# Altium PCB ShiftRegPCB.PcbDoc
Units mil, origin at the board's own origin, x right, y up, seen from the top; angles counter-clockwise.
Board outline 3917.32 x 2185.04 mil, 2 copper layers (Top Layer, Bottom Layer); 24 components, 18 nets, 81 pads, 0 vias.
Unrouted connection lines stored in the file: 3.
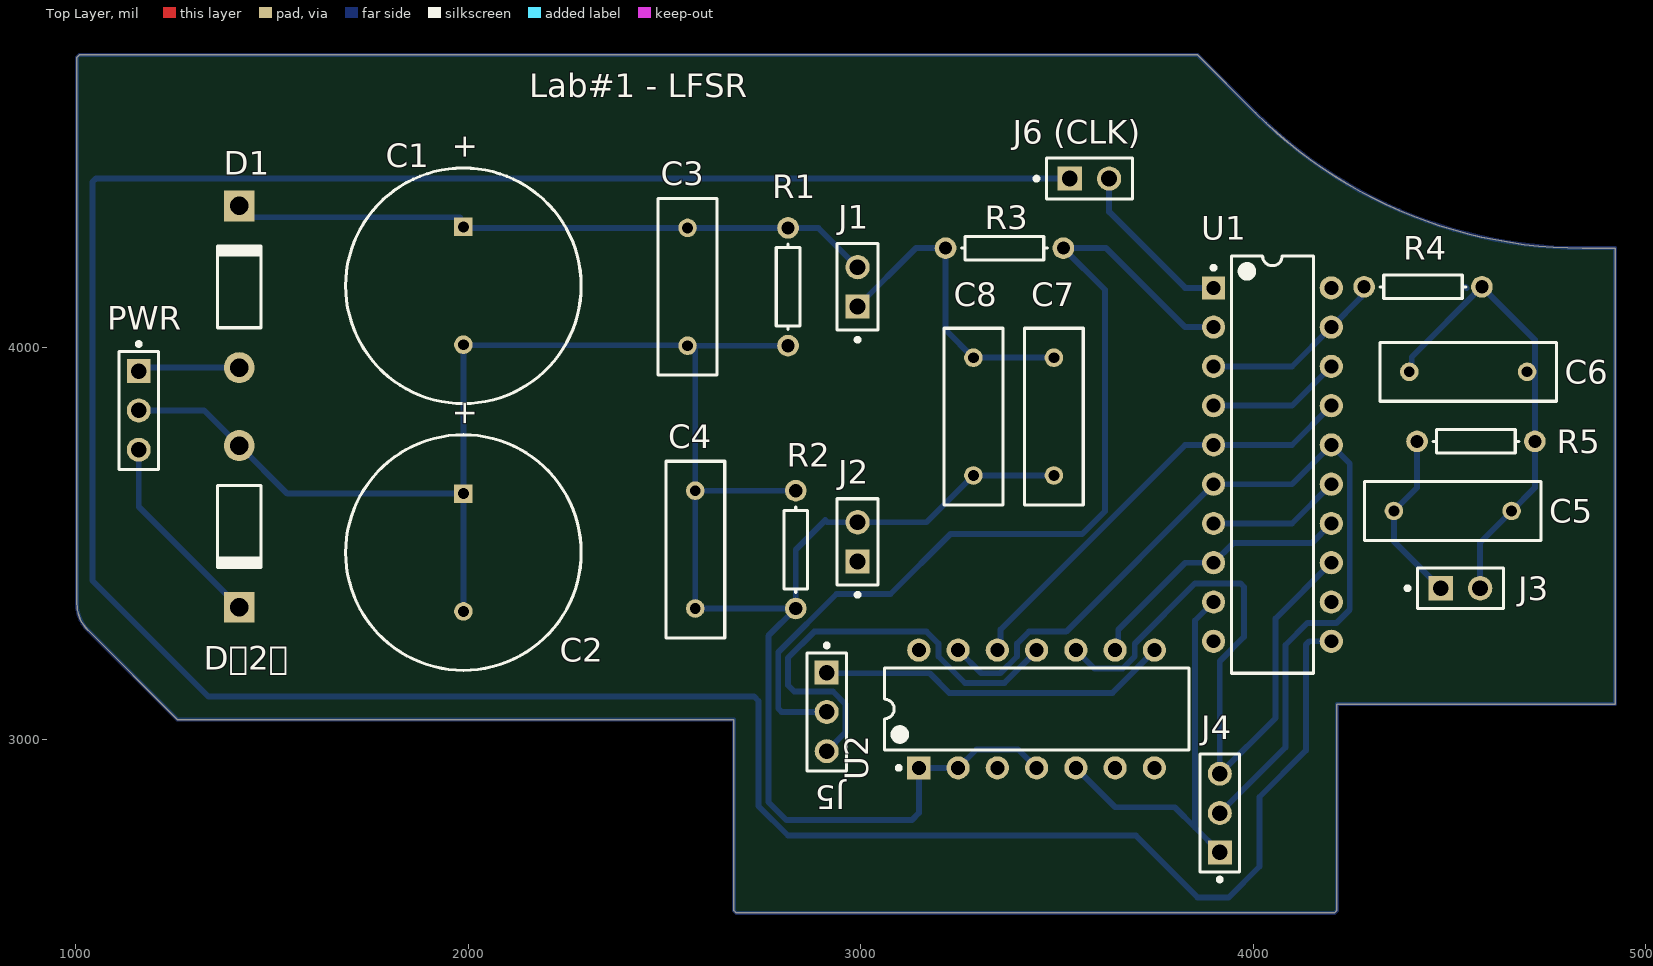
[diagram p0: Top Layer view]
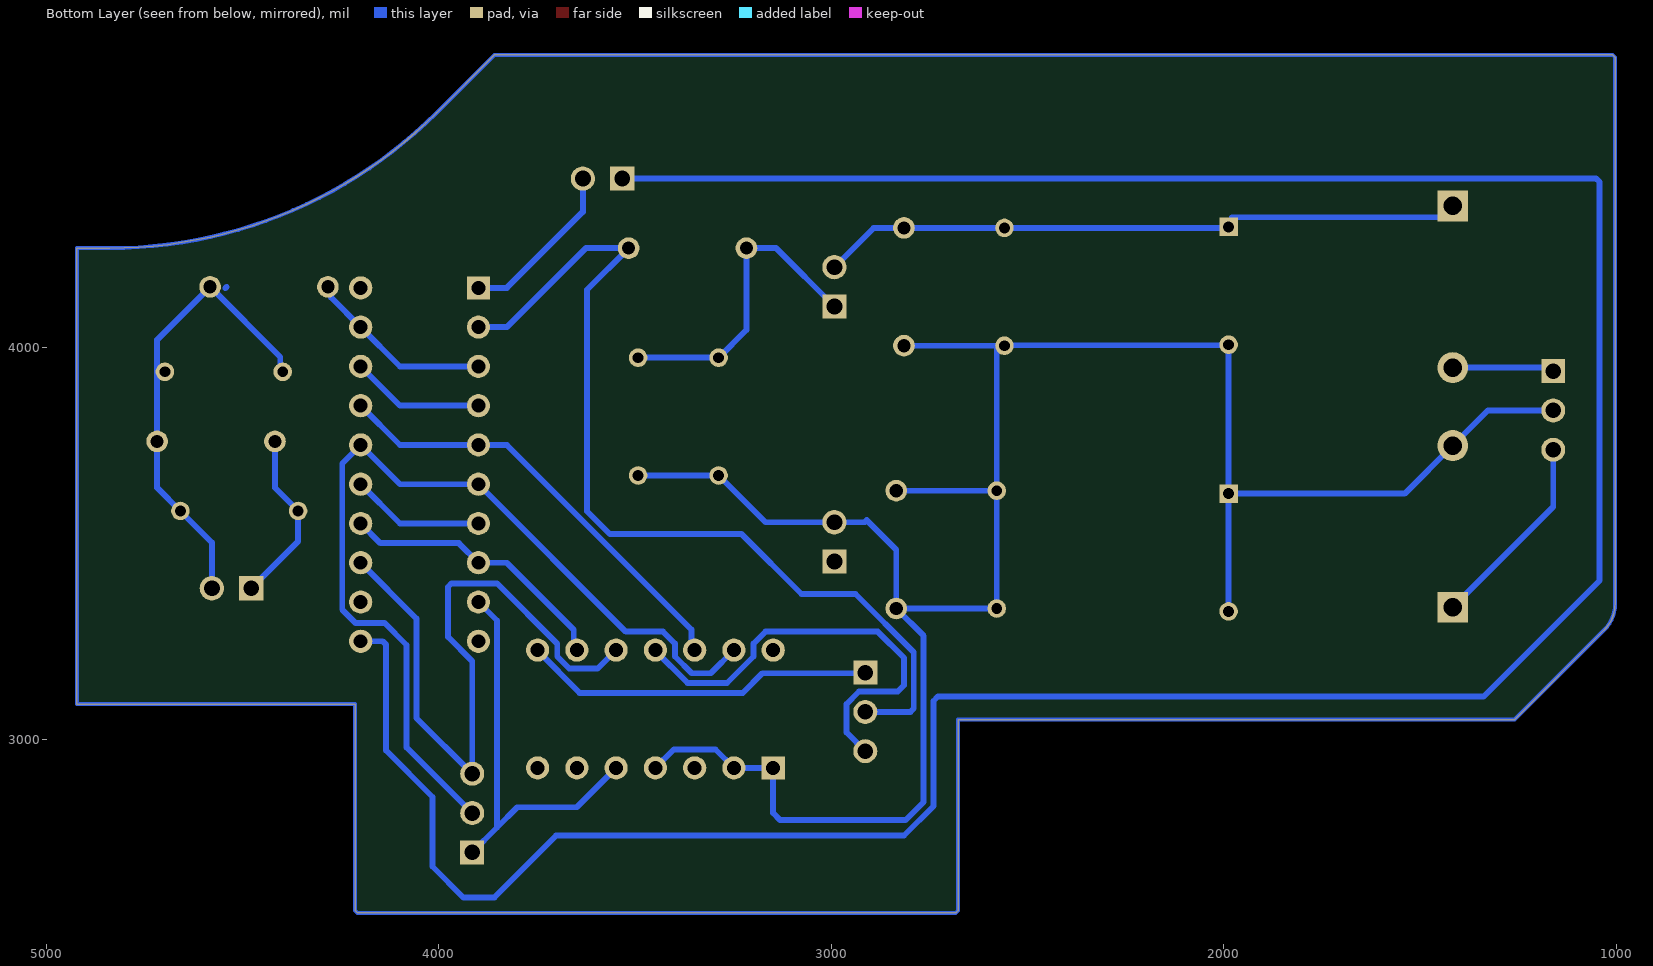
[diagram p1: Bottom Layer view, seen from below]

## Layer stack, top to bottom
Top Solder: solder mask 0.4, Solder Resist, Dk 3.5
Top Layer: signal copper 1.4
Dielectric 1: dielectric 12.6, FR-4, Dk 4.8
Bottom Layer: signal copper 1.4
Bottom Solder: solder mask 0.4, Solder Resist, Dk 3.5

## Board outline
1259.84,3051.18 1031.78,3279.25 cw(c1098.98,3346.46) 1003.94,3346.46 1003.94,4738.24 1009.79,4744.09 3858.27,4744.09 4005.85,4596.52 ccw(c4837.66,5428.33) 4837.66,4251.97 4921.26,4251.97 4921.26,3090.55 4212.6,3090.55 4212.6,2564.91 4206.74,2559.06 2683.02,2559.06 2677.17,2564.91 2677.17,3051.18

## Design rules (kind name [scope] priority, off if disabled: settings)
Clearance [All] p1: gap=10 ignorepadtopadclearanceinfootprint=FALSE except(0: Arc-Hole Track-Hole SMDPad-Hole THPad-Hole Via-Hole Fill-Hole Poly-Hole Region-Hole Text-Hole)
PolygonConnect [All] p1: connectstyle=Relief reliefconductorwidth=10 reliefentries=4 polygonreliefangle="90 Angle" airgapwidth=10
RoutingVias [All] p1: holewidth=28 width=50 viastyle="Through Hole" minholewidth=28 minwidth=50 maxholewidth=28 maxwidth=50
SolderMaskExpansion [All] p1: expansion=4 istentingtop=FALSE
Width [All] p1: maxlimit=15 minlimit=15 preferedwidth=15 minimp=50.000000 maximp=50.000000 favimp=50.000000
30 further rules are at their usual default settings.

## Components (designator, comment, footprint, x,y, rotation, side; value= is the part's Value field where it differs from the comment)
C1 "Cap Pol1" RB7.6-15 1988.19,4156.13 r90 top value=270uF
C2 "Cap Pol1" RB7.6-15 1988.19,3476.77 r90 top value=270uF
C3 "Cap" RAD-0.3 2559.06,4153.54 r90 top value=0.1uF
C4 "Cap" RAD-0.3 2578.74,3484.25 r90 top value=0.1uF
C5 "Cap" RAD-0.3 4507.87,3582.68 r0 top value=1uF
C6 "Cap" RAD-0.3 4547.24,3937.01 r0 top value=0.001uF
C7 "Cap" RAD-0.3 3491.93,3823.03 r270 top value=0.1uF
C8 "Cap" RAD-0.3 3286.93,3823.03 r270 top value=0.1uF
D1 "Diode 1N4004" DO-41 1417.32,4153.54 r90 top
D2 "Diode 1N4004" DO-41 1417.32,3543.31 r270 top
J1 "M20-9990246" FP-M20-9990246-MFG 2992.13,4153.54 r90 top
J2 "M20-9990246" FP-M20-9990246-MFG 2992.13,3503.94 r90 top
J3 "M20-9990246" FP-M20-9990246-MFG 4527.56,3385.83 r0 top
J4 "90120-0123" FP-90120-0123-MFG 3914.54,2813.39 r90 top
J5 "90120-0123" FP-90120-0123-MFG 2913.39,3070.87 r270 top
"J6 (CLK)" "M20-9990246" FP-M20-9990246-MFG 3582.68,4429.13 r0 top
PWR "90120-0123" FP-90120-0123-MFG 1161.42,3838.58 r270 top
R1 "Res1" AXIAL-0.3 2814.96,4153.54 r270 top value=1K
R2 "Res1" AXIAL-0.3 2834.65,3484.25 r90 top value=1K
R3 "Res1" AXIAL-0.3 3366.14,4251.97 r0 top value=10K
R4 "Res1" AXIAL-0.3 4432.09,4153.54 r0 top value=100K
R5 "Res1" AXIAL-0.3 4566.93,3759.84 r0 top value=100K
U1 "SN74HC574N" N0020A 4048.59,3700.79 r0 top
U2 "SN74HC86N" N0014A 3448.03,3078.35 r90 top

## Footprints (in the part's own frame and the unit in brackets; to place one, negate y for a bottom-side part, rotate by r counter-clockwise, add the part's x,y. Pads: shape width x height; smd on the part's side, far side on the other; paste and mask are expansions set on the pad)
AXIAL-0.3 [mm] "Axial Device, Thru-Hole; 2 Leads; 0.3 in Pin Spacing"
  round 1.4 hole 0.85: 1(-3.81,0) 2(3.81,0)
  silkscreen extent -2.77,-0.76 2.77,0.76
DO-41 [mm] "Diode, Axial; Body 5.2 x 2.7 mm (LxDia. max), Lead Dia. 0.86 mm (max)"
  round 2 hole 1.2: 1(-5.23,0)
  rect 2x2 hole 1.2: 2(5.23,0)
  silkscreen extent -2.65,-1.4 2.75,1.4
FP-90120-0123-MFG [mm]
  rect 1.55x1.55 hole 1 paste-1000 mask+0: 1(-2.54,0)
  round 1.55 hole 1 paste-1000 mask+0: 2(0,0) 3(2.54,0)
  silkscreen extent -4.42,-1.27 3.81,1.27, body extent -3.91,-1.37 3.91,1.37, height 0.25
FP-M20-9990246-MFG [mm]
  rect 1.57x1.57 hole 1.02 paste-1000 mask+0: 1(-1.27,0)
  round 1.57 hole 1.02 paste-1000 mask+0: 2(1.27,0)
  silkscreen extent -3.55,-1.32 2.79,1.32, body extent -2.89,-1.42 2.89,1.42, height 0.25
N0014A [mm] "DIP, 14-Leads, Body 19.7x6.6mm, Pitch 2.54mm"
  rect 1.5x1.5 hole 0.9: 1(-3.81,7.62)
  round 1.5 hole 0.9: 2(-3.81,5.08) 3(-3.81,2.54) 4(-3.81,0) 5(-3.81,-2.54) 6(-3.81,-5.08) 7(-3.81,-7.62) 8(3.81,-7.62) 9(3.81,-5.08) 10(3.81,-2.54) 11(3.81,0) 12(3.81,2.54) 13(3.81,5.08) 14(3.81,7.62)
  silkscreen extent -3.93,-9.85 2.65,9.85, body extent -3.95,-9.85 3.95,9.85, height 5.08
N0020A [mm] "DIP, 20-Leads, Body 26.9x6.6mm, Pitch 2.54mm"
  rect 1.5x1.5 hole 0.9: 1(-3.81,11.43)
  round 1.5 hole 0.9: 2(-3.81,8.89) 3(-3.81,6.35) 4(-3.81,3.81) 5(-3.81,1.27) 6(-3.81,-1.27) 7(-3.81,-3.81) 8(-3.81,-6.35) 9(-3.81,-8.89) 10(-3.81,-11.43) 11(3.81,-11.43) 12(3.81,-8.89) 13(3.81,-6.35) 14(3.81,-3.81) 15(3.81,-1.27) 16(3.81,1.27) 17(3.81,3.81) 18(3.81,6.35) 19(3.81,8.89) 20(3.81,11.43)
  silkscreen extent -3.93,-13.5 2.65,13.5, body extent -3.95,-13.45 3.95,13.45, height 5.08
RAD-0.3 [mm] "Radial Cap, Thru-Hole; 2 Leads; 0.3 in Pin Spacing"
  round 1.2 hole 0.7: 1(-3.81,0) 2(3.81,0)
  silkscreen extent -5.71,-1.91 5.72,1.9
RB7.6-15 [mm] "Polarized Capacitor (Radial); 2 Leads"
  rect 1.2x1.2 hole 0.7: 1(3.81,0)
  round 1.2 hole 0.7: 2(-3.81,0)
  silkscreen extent -7.62,-7.62 7.62,7.62

## Part data
C1 C2: "Polarized Capacitor (Radial)", LatestRevisionDate=17-Jul-2002, LatestRevisionNote="Re-released for DXP Platform.", PackageDescription="Polarized Capacitor (Radial); 2 Leads", PackageReference=RB7.6-15, Published=8-Jun-2000, Publisher="Altium Limited"
C3 C4 C5 C6 C7 C8: "Capacitor", LatestRevisionDate=17-Jul-2002, LatestRevisionNote="Re-released for DXP Platform.", PackageDescription="Radial Cap, Thru-Hole; 2 Leads; 0.3 in Pin Spacing", PackageReference=RAD-0.3, Published=8-Jun-2000, Publisher="Altium Limited"
D1 D2: "1 Amp General Purpose Rectifier", Code_JEDEC=DO-204-AL, ComponentLink1Description="Manufacturer Link", ComponentLink1URL=http://www.fairchildsemi.com/, ComponentLink2Description=Datasheet, ComponentLink2URL=http://www.fairchildsemi.com/ds/1N%2F1N4001.pdf, DatasheetVersion=1998, LatestRevisionDate=17-Jul-2002, LatestRevisionNote="Re-released for DXP Platform.", PackageDescription="Diode, Axial; Body 5.2 x 2.7 mm (LxDia. max), Lead Dia. 0.86 mm (max)", PackageReference=DO-41, PackageVersion=Aug-1999, Published=8-Jun-2000, Publisher="Altium Limited"
J1 J2 J3 "J6 (CLK)": library part CMP-15831-000009-1, "CONN HEADER VERT 2POS 2.54MM", Current Rating=3A, Manufacturer=Harwin, Temperature="-40°C to +105°C", Temperature Range High=+105°C, Temperature Range Low=-40°C, Automotive=No, Category=Conn, ComponentLink2Description=Datasheet, ComponentLink2URL=https://cdn.harwin.com/pdfs/M20-999.pdf, Conn Gender=Male, Conn Orientation=Vertical, Contact Material=Tin,Nickel, Device Class L1=Connectors, Device Class L2="Headers and Wire Housings", Device Class L3=unset, Digikey Description="CONN HEADER VERT 2POS 2.54MM", Height=8.99mm, Lead Free=Yes, Manufacturer Part Number=M20-9990246, Mouser Description="2.54mm (0.1\") Pitch SIL Vertical PC Tail Pin Header, 6.1mm mating pin height, tin, 2 contacts", Number Of Contacts=2, Number Of Rows=1, Octopart=https://octopart.com/m20-9990246-harwin-2590635, Package=M20-9990246, Pitch=2.54mm, RoHS=TRUE
J4 J5 PWR: library part CMP-04776-000237-1, "CONN HEADER VERT 3POS 2.54MM", Color=Black, Contact Resistance=20mR, Current Rating=3A, Max Operating Temperature=125°C, Max Voltage Rating (DC)=350.35kV, Min Operating Temperature=-55°C, Voltage Rating=350V, Contact Gender=Male, Contact Material=Brass, Contact Mating Length=6.75mm, Contact Plating=Tin, Contact Post Length=2.9mm, Gender=Male, Glow Wire Compliant=Non-compliant, Housing Color=Black, Housing Material=Polyester, Lead Free="Lead Free", Mount="Through Hole", Number of Circuits=3, Number Of Contacts=3, Number of Positions=3, Number Of Rows=1, Orientation=Vertical, Packaging=Tray, Pitch=2.54mm, Radiation Hardening=No, REACH SVHC="No SVHC", RoHS Compliant=Yes, Series=90120, Termination=Solder, Voltage Rating (AC)=350V
R1 R2 R3 R4 R5: "Resistor", LatestRevisionDate=17-Jul-2002, LatestRevisionNote="Re-released for DXP Platform.", PackageDescription="Axial Device, Thru-Hole; 2 Leads; 0.3 in Pin Spacing", PackageReference=AXIAL-0.3, Published=8-Jun-2000, Publisher="Altium Limited"
U1: library part CMP-1619-00814-2, "Octal Edge-Triggered D-Type Flip-Flops With 3-State Outputs, N0020A, TUBE", F @ Nom Voltage(Max)(Mhz)=28, Generic Part Number=SN74HC574, ICC @ Nom Voltage(Max)(mA)=0.08, Manufacturer="Texas Instruments", Operating Temperature Range(C)="-40 to 85", Rating=Catalog, tpd @ Nom Voltage(Max)(ns)=38, Voltage(Nom)(V)=3.3,5, 3-State Output=Yes, Bits(#)=8, Code_JEDEC=MS-001, DatasheetVersion=SCLS148F, Input Type=CMOS, Output Drive (IOL/IOH)(Max)(mA)=7.8/-7.8, Output Logic=Non-inverted, Output Type=CMOS, PackageReference=N0020A, Schmitt Trigger=No, Technology Family=HC, VCC(Max)(V)=6, VCC(Min)(V)=2
U2: library part CMP-0778-00109-3, "Quadruple 2-Input Exclusive-OR Gates, N0014A, TUBE", F @ Nom Voltage(Max)(Mhz)=70, Generic Part Number=SN74HC86, ICC @ Nom Voltage(Max)(mA)=0.02, Manufacturer="Texas Instruments", Operating Temperature Range(C)="-40 to 85", Rating=Catalog, tpd @ Nom Voltage(Max)(ns)=21, Voltage(Nom)(V)=5, Bits(#)=4, DatasheetVersion=SCLS100E, Input Type=CMOS, Output Drive (IOL/IOH)(Max)(mA)=5.2/-5.2, Output Type=CMOS, PackageReference=N0014A, Schmitt Trigger=No, Technology Family=HC, VCC(Max)(V)=6, VCC(Min)(V)=2

## Nets (pads, with @x,y where several pads share a name; then routed paths per layer and width w, separated by ;. In a path a pad name is that pad's centre, name@x,y a point inside that pad or via, vN(x,y) a via of type N, cw(c..) or ccw(c..) an arc to the next point about the centre after c; other vN are vias at no path point)
+5.7V: D1.1 PWR.1 | length 259.7
  Bottom Layer w15: PWR.1 1170.47,3947.64 D1.1
+5V: J5.2 R3.2 U1.2 | length 2430.9
  Bottom Layer w15: J5.2 2798.75,3070.87 2789.96,3079.65 2789.96,3223.03 2938.23,3371.3 3076.03,3371.3 3228.35,3523.62 3563.86,3523.62 3622.05,3581.81 3622.05,4146.06 R3.2 3625.2,4251.97 3826.38,4050.79 U1.2
-5.7V: D2.2 PWR.3 | length 507.2
  Bottom Layer w15: PWR.3 1161.42,3593.31 D2.2
"Analog Noise 1": C5.2 C6.1 C6.2 J3.2 R4.2 R5.2 | length 1179.7
  Bottom Layer w15: C6.1 4403.41,3943.18 4403.41,3974.87 R4.2 4716.93,4018.7 R5.2 4716.93,3641.73 C5.2 4577.56,3502.36 J3.2 ; 4539.76,4153.54 4543.5,4149.8
"Analog Noise 2": C5.1 J3.1 R5.1 | length 448.1
  Bottom Layer w15: R5.1 4416.93,3641.73 C5.1 4357.87,3505.51 J3.1
Clk: "J6 (CLK).1" U1.11 | length 7686.3
  Bottom Layer w15: 3532.68,4429.13 1052.09,4429.13 1043.31,4420.35 1043.31,3405.51 1338.58,3110.24 2728.58,3110.24 2739.96,3098.86 2739.96,2830.91 2814.96,2755.91 3700.79,2755.91 3858.27,2598.43 3937.01,2598.43 4015.75,2677.17 4015.75,2854.33 4133.86,2972.44 4133.86,3242 4142.65,3250.79 U1.11
LongSeq: J5.1 U2.8 | length 902.3
  Bottom Layer w15: J5.1 2914.96,3169.29 3175.65,3169.29 3225.65,3119.29 3640.84,3119.29 3748.03,3226.48 U2.8
LongSeqOut: J4.3 U1.13 U2.10 | length 1716.8
  Bottom Layer w15: U2.10 3595.06,3181.32 3667.51,3181.32 3698.03,3211.84 3698.03,3244.85 3850.99,3397.82 3967.59,3397.82 3976.38,3389.03 3976.38,3262.07 3914.54,3200.23 J4.3 4056.75,3055.6 4056.75,3308.95 U1.13
NegVol: "J6 (CLK).2" C1.2 C2.1 C2.2 C3.1 C4.1 C4.2 C7.2 C8.2 D2.1 J2.2 J4.1 PWR.2 R1.2 R2.1 R2.2 U1.1 U1.9 U2.1 U2.2 U2.4 U2.5 | length 7378.2
  Bottom Layer w15: PWR.2 1327.95,3838.58 D2.1 1539.76,3626.77 C2.1 ; C2.2 C2.1 ; C3.1 C3.1@2559.06,4004.84 ; R1.2 2578.74,4003.54 C3.1@2571.26,4003.54 ; R2.2 C4.2 ; U2.4 3401,2975.37 3295.06,2975.37 U2.2 U2.1 3148.03,2813.39 3129.92,2795.28 2810.95,2795.28 2764.96,2841.26 2764.96,3264.57 R2.1 ; C7.2 C8.2 3167.84,3553.94 J2.2 2914.96,3553.94 2909.65,3559.25 2834.65,3484.25 R2.1 ; U2.5 3648.22,2828.16 3799.77,2828.16 3851.56,2776.36 ; 3632.68,4429.13 3632.68,4344.49 3826.38,4150.79 U1.1 ; U1.9 3851.56,3303.76 3851.56,2776.36 ; J4.1 3851.56,2776.36 ; C2.1 C1.2 1989.48,4004.84 C3.1@2559.06,4004.84 ; C3.1@2559.06,4004.84 2559.06,4015.75 C3.1@2571.26,4003.54 ; C3.1@2571.26,4003.54 2578.74,3996.06 C4.2 ; C4.2 C4.1 R2.1
NetC7_1: C7.1 C8.1 J1.1 R3.1 | length 798.8
  Bottom Layer w15: J1.1 3140.55,4251.97 R3.1 3216.14,4043.82 C8.1 C7.1
NetR4_1: R4.1 U1.3 U1.19 | length 478.8
  Bottom Layer w15: U1.3 4098.59,3950.79 U1.19 4274.41,4126.61 4274.41,4145.87 R4.1
NetU1_4: U1.4 U1.18 | length 341.4
  Bottom Layer w15: U1.4 4098.59,3850.79 U1.18
NetU1_5: U1.5 U1.17 U2.12 | length 1134.2
  Bottom Layer w15: U2.12 3355.96,3236.28 3355.96,3280.37 3826.38,3750.79 U1.5 4098.59,3750.79 U1.17
NetU1_7: U1.7 U1.15 | length 341.4
  Bottom Layer w15: U1.7 4098.59,3550.79 U1.15
NetU1_8: U1.8 U1.14 U2.9 | length 710
  Bottom Layer w15: U2.9 3655.96,3236.28 3655.96,3280.37 3826.38,3450.79 U1.8 3948.59,3500.79 4148.59,3500.79 U1.14
PosVol: C1.1 C3.2 D1.2 J1.2 R1.1 | length 1648.6
  Bottom Layer w15: D1.2 1446.06,4330.71 1979.4,4330.71 1979.4,4314.92 C1.1 1990.78,4303.54 C3.2 R1.1 2892.13,4303.54 J1.2
ShortSeq: J5.3 U2.11 | length 1146.3
  Bottom Layer w15: J5.3 2961.4,3018.88 2961.4,3090.75 2929.3,3122.85 2830.81,3122.85 2814.96,3138.71 2814.96,3208.66 2881.67,3275.37 3167.51,3275.37 3198.03,3244.85 3198.03,3211.84 3265.58,3144.29 3365.84,3144.29 3448.03,3226.48 U2.11
ShortSeqOut: J4.2 U1.6 U1.16 U2.13 | length 2372.6
  Bottom Layer w15: U2.13 3307.09,3169.29 3355.48,3169.29 3398.03,3211.84 3398.03,3244.85 3428.55,3275.37 3523.18,3275.37 U1.6 4098.59,3650.79 U1.16 4245.62,3703.76 4245.62,3331.31 4212.13,3297.82 4138.05,3297.82 4081.75,3241.52 4081.75,2980.6 J4.2
pads on no net: J2.1 U1.10 U1.12 U1.20 U2.3 U2.6 U2.7 U2.14
copper on no net: | length 11701.5
  Bottom Layer w10: 1003.94,3346.46 ccw(c1098.98,3346.46) 1031.78,3279.25 1259.84,3051.18 2677.17,3051.18 2677.17,2564.91 2683.02,2559.06 4206.74,2559.06 4212.6,2564.91 4212.6,3090.55 4921.26,3090.55 4921.26,4251.97 4837.66,4251.97 cw(c4837.66,5428.33) 4005.85,4596.52 3858.27,4744.09 1009.79,4744.09 1003.94,4738.24 1003.94,3346.46

## Silkscreen, mask and mechanical layers (free items; w line width, h text height)
Top Overlay:
  text "Lab#1 - LFSR" at 2155.67,4635.98 h60

## Text inside footprints (layer, text, board x,y; h text height)
C1: Top Overlay "+" at 2017.2,4476.29 h59.06 r90
C2: Top Overlay "+" at 2017.2,3796.93 h59.06 r90